# EAGLE board sw63_mk3 (EAGLE 9.6.2)
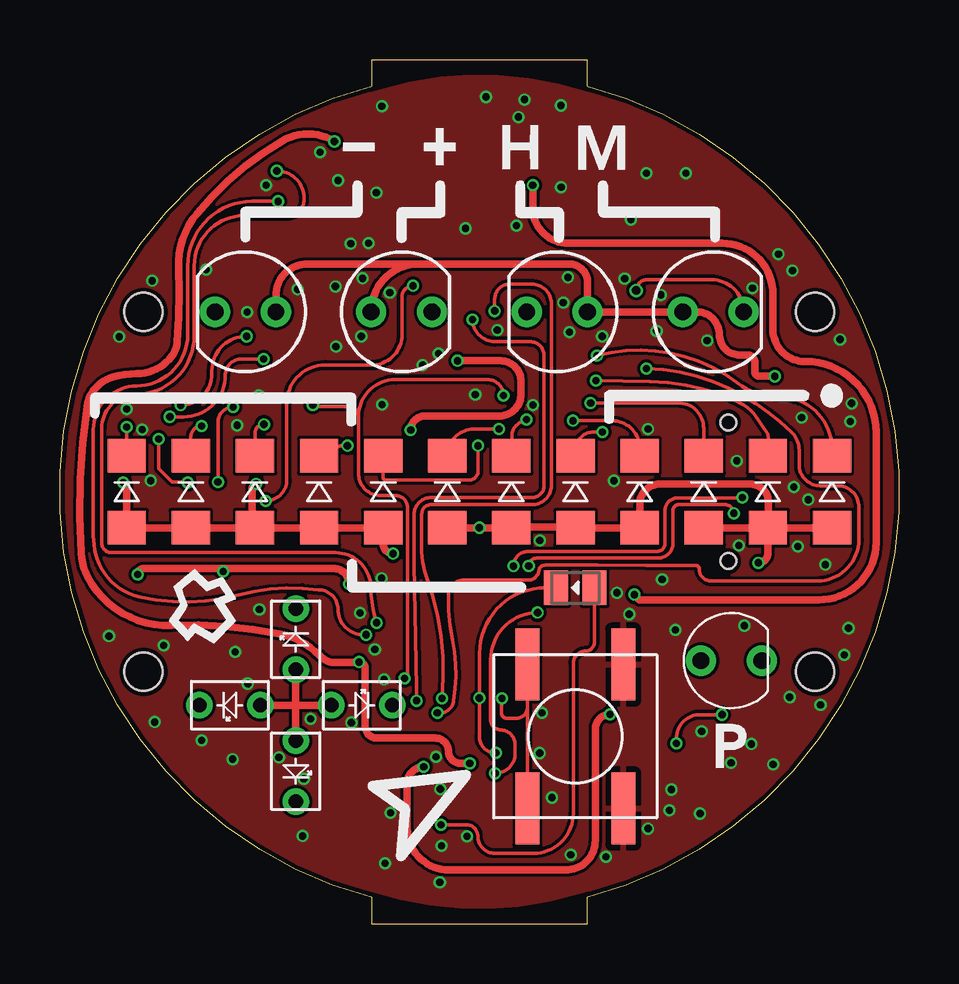
[diagram p0: board, top side]
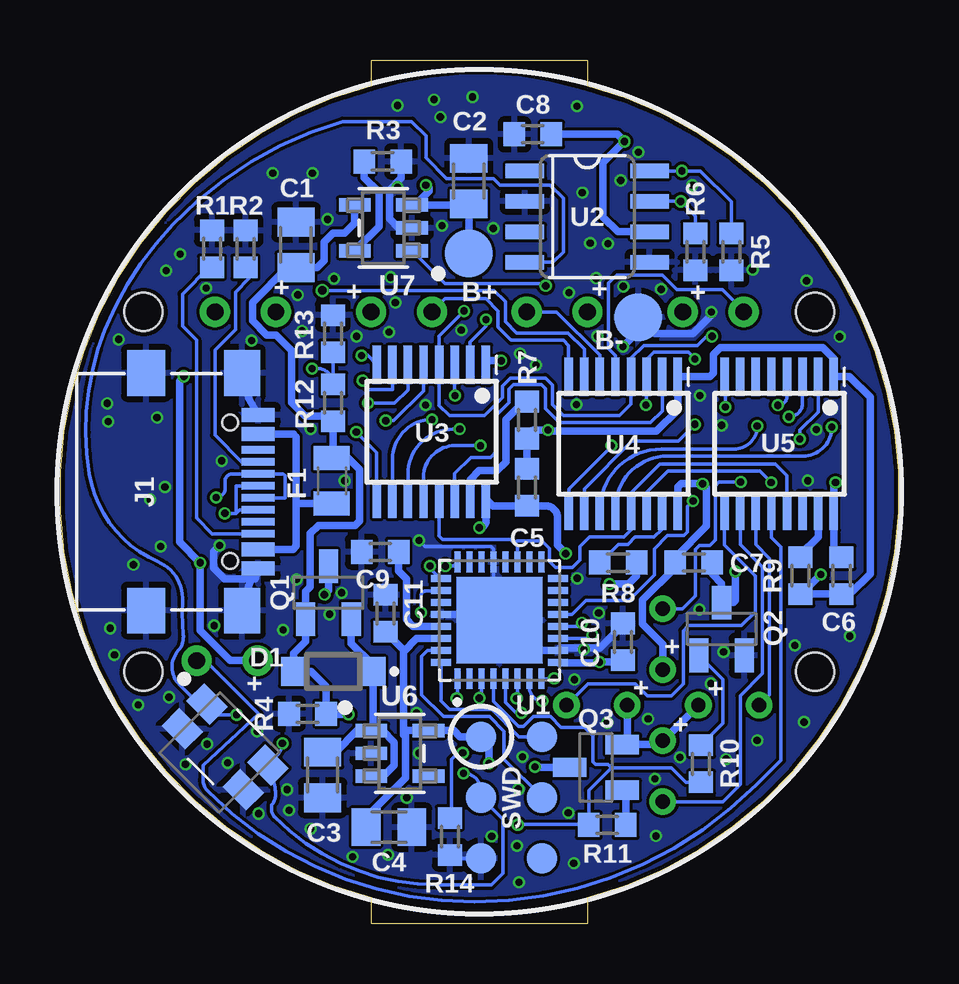
[diagram p1: board, bottom side, seen from below]

Size 34.97 x 36 mm. Coordinates in mm from the lower left corner, seen from the top.
Outline: 21.98,34.92 21.98,36 12.98,36 12.98,34.92 arc150 12.98,1.08 12.98,0 21.98,0 21.98,1.08 arc150 21.98,34.92
Copper layers (1*16): Top 0.035mm / dielectric 1.6mm / Bottom 0.035mm
Design rules "jlcpcb-2layers *": minimum track width 5mil, minimum drill 0.3mm, track to track 5mil, track to pad 5mil, pad to pad 5mil, via to via 5mil, smd to smd 5mil, copper to edge 0.2mm, drill to drill 6mil, minimum pad ring 10mil, minimum via ring 4mil, stop-mask expansion 4mil, vias tented up to drill 15mil, thermal gap 10mil
Holes 1.6 mm at 3.48,10.5 3.48,25.5 31.48,10.5 31.48,25.5
tRestrict: area 12.1,34.7 to 23.1,36.3; area 11.9,-0.3 to 22.9,1.3
bRestrict: area 12.1,34.7 to 23.1,36.3; area 11.9,-0.3 to 22.9,1.3

## Footprints (pad centres in the part's own frame; a part is rotated, then mirrored left to right if it is on the bottom)
TEST_PIN_2.0 = smd 2 x 2: P$1 0,0
CAPACITOR0805 = smd 1.2 x 1.55: 1 -0.95,0; 2 0.95,0
CAPACITOR0603 = smd 0.9 x 1: 1 -0.771,0; 2 0.771,0
SOD123 = smd 1.05 x 1.2: A 1.654,0; C -1.654,0
LED_RECT_3.2X2 = drill 0.6: A -1.27,0; K 1.27,0
PTC0805 = smd 1 x 1.5: 2 0.921,0; 3 -0.972,0
LED_5MM_BLUE = drill 0.7 pad 1.143: A -1.27,0; K 1.27,0
USB-C_FULL_SMT = smd 1.9 x 1.6: 13 -4.95,-1.089; 14 4.95,-1.089 | smd 1.9 x 1.5: 15 -4.95,2.911; 16 4.95,2.911 | smd 0.584 x 1.372: A1-B12 -3.2,3.581; A4-B9 -2.4,3.581; B1-A12 3.2,3.581; B4-A9 2.4,3.581 | smd 0.305 x 1.372: A5 -1.25,3.581; A6 -0.25,3.581; A7 0.25,3.581; A8 1.25,3.581; B5 1.75,3.581; B6 0.75,3.581; B7 -0.75,3.581; B8 -1.75,3.581 | hole 0.65: 2.896,2.413; -2.896,2.413
LED_1206 = smd 1.4 x 1.6: A -1.5,0; C 1.5,0
LED_5MM_RED = drill 0.7 pad 1.143: A -1.27,0; K 1.27,0
LED_5MM_YELLOW = drill 0.7 pad 1.143: A -1.27,0; K 1.27,0
LED_5MM_GREEN = drill 0.7 pad 1.143: A -1.27,0; K 1.27,0
LED_3MM_ALT = drill 0.7 pad 1.143: A -1.27,0; K 1.27,0
SOT23 = smd 0.8 x 1.4: 1 -0.95,-1.1; 2 0.95,-1.1; 3 0,1.1
TEMT6200FX01 = smd 1 x 1.45: C 0.8,0; E -0.8,0
RESISTOR0603 = smd 0.9 x 1: 1 -0.771,0; 2 0.771,0
KSC3XXJ = smd 3 x 1: 1 -3,2; 2 -3,-2; 3 3,2; 4 3,-2
EVQ-P7J01P = smd 1.4 x 1.05: 1_1 -1.8,0.725; 1_2 1.8,0.725; 2_1 -1.8,-0.725; 2_2 1.8,-0.725
2X3_POGO_NO_VIA = smd 1.27 x 1.27: P$1 0,0; P$2 0,2.54; P$3 2.54,0; P$4 2.54,2.54; P$5 5.08,0; P$6 5.08,2.54
QFN50P500X500X100-33N = smd 0.84 x 0.26: 1 -2.435,1.75; 2 -2.435,1.25; 3 -2.435,0.75; 4 -2.435,0.25; 5 -2.435,-0.25; 6 -2.435,-0.75; 7 -2.435,-1.25; 8 -2.435,-1.75; 17 2.435,-1.75; 18 2.435,-1.25; 19 2.435,-0.75; 20 2.435,-0.25; 21 2.435,0.25; 22 2.435,0.75; 23 2.435,1.25; 24 2.435,1.75 | smd 0.26 x 0.84: 9 -1.75,-2.435; 10 -1.25,-2.435; 11 -0.75,-2.435; 12 -0.25,-2.435; 13 0.25,-2.435; 14 0.75,-2.435; 15 1.25,-2.435; 16 1.75,-2.435; 25 1.75,2.435; 26 1.25,2.435; 27 0.75,2.435; 28 0.25,2.435; 29 -0.25,2.435; 30 -0.75,2.435; 31 -1.25,2.435; 32 -1.75,2.435 | smd 3.6 x 3.6: 33 0,0
SO8 = smd 1.6 x 0.6: 1 -2.6,1.905; 2 -2.6,0.635; 3 -2.6,-0.635; 4 -2.6,-1.905; 5 2.6,-1.905; 6 2.6,-0.635; 7 2.6,0.635; 8 2.6,1.905
TSSOP16 = smd 1.6 x 0.35: 1 -2.8,2.275; 2 -2.8,1.625; 3 -2.8,0.975; 4 -2.8,0.325; 5 -2.8,-0.325; 6 -2.8,-0.975; 7 -2.8,-1.625; 8 -2.8,-2.275; 9 2.8,-2.275; 10 2.8,-1.625; 11 2.8,-0.975; 12 2.8,-0.325; 13 2.8,0.325; 14 2.8,0.975; 15 2.8,1.625; 16 2.8,2.275
SOT23-5 = smd 1.321 x 0.559: 1 -1.194,0.95; 2 -1.194,0; 3 -1.194,-0.95; 4 1.194,-0.95; 5 1.194,0.95

## Placement (x,y rotation side)
B+  TEST_PIN_LARGE  [TEST_PIN_2.0]  17.93,27.93 0 bottom
B-  TEST_PIN_LARGE  [TEST_PIN_2.0]  10.86,25.28 0 bottom
C1  10u  [CAPACITOR0805]  25.12,28.29 90 bottom
C2  10u  [CAPACITOR0805]  17.92,30.95 90 bottom
C3  10u  [CAPACITOR0805]  24.02,6.2 270 bottom
C4  10u  [CAPACITOR0805]  21.25,4.02 0 bottom
C5  100n  [CAPACITOR0603]  15.49,18.18 270 bottom
C6  100n  [CAPACITOR0603]  2.38,14.5 90 bottom
C7  100n  [CAPACITOR0603]  8.54,15.05 180 bottom
C8  100n  [CAPACITOR0603]  15.25,32.9 180 bottom
C9  1u  [CAPACITOR0603]  21.61,15.49 0 bottom
C10  100n  [CAPACITOR0603]  11.5,11.74 270 bottom
C11  100n  [CAPACITOR0603]  21.4,12.93 270 bottom
D1  1N5819  [SOD123]  23.57,10.51 180 bottom
DOWN  LED_RECT-3.2X2  [LED_RECT_3.2X2]  9.83,6.35 270 top
F1  500mA  [PTC0805]  23.63,18.43 270 bottom
HOURS  [LED_5MM_BLUE]  20.72,25.5 180 top
J1  USB-C_2.0_SMT  [USB-C_FULL_SMT]  30.28,18 270 bottom
LD1  LED_SMT_1206  [LED_1206]  2.78,18 90 top
LD2  LED_SMT_1206  [LED_1206]  5.46,18 90 top
LD3  LED_SMT_1206  [LED_1206]  8.13,18 90 top
LD4  LED_SMT_1206  [LED_1206]  10.8,18 90 top
LD5  LED_SMT_1206  [LED_1206]  13.47,18 90 top
LD6  LED_SMT_1206  [LED_1206]  16.15,18 90 top
LD7  LED_SMT_1206  [LED_1206]  18.82,18 90 top
LD8  LED_SMT_1206  [LED_1206]  21.49,18 90 top
LD9  LED_SMT_1206  [LED_1206]  24.16,18 90 top
LD10  LED_SMT_1206  [LED_1206]  26.84,18 90 top
LD11  LED_SMT_1206  [LED_1206]  29.51,18 90 top
LD12  LED_SMT_1206  [LED_1206]  32.18,18 90 top
LEFT  LED_RECT-3.2X2  [LED_RECT_3.2X2]  7.08,9.1 180 top
MINUS  [LED_5MM_RED]  7.73,25.5 180 top
MINUTES  [LED_5MM_YELLOW]  27.23,25.5 0 top
PLUS  [LED_5MM_GREEN]  14.24,25.5 0 top
PM  [LED_3MM_ALT]  27.99,10.96 0 top
Q1  LGE2305  [SOT23]  23.77,13.79 0 bottom
Q2  BC817S  [SOT23]  7.38,12.28 0 bottom
Q3  BC817S  [SOT23]  12.62,6.51 90 bottom
Q4  TEMT6200FX01  [TEMT6200FX01]  21.48,14 0 top
R1  5k1  [RESISTOR0603]  28.63,28.13 270 bottom
R2  5k1  [RESISTOR0603]  27.23,28.12 270 bottom
R3  10k  [RESISTOR0603]  21.51,31.77 180 bottom
R4  10k  [RESISTOR0603]  24.64,8.75 0 bottom
R5  4k7  [RESISTOR0603]  6.98,28 90 bottom
R6  4k7  [RESISTOR0603]  8.48,28 90 bottom
R7  10k  [RESISTOR0603]  15.5,20.99 90 bottom
R8  10k  [RESISTOR0603]  11.7,15.04 180 bottom
R9  2k  [RESISTOR0603]  4.09,14.5 90 bottom
R10  10k  [RESISTOR0603]  8.24,6.66 270 bottom
R11  10k  [RESISTOR0603]  12.15,4.11 180 bottom
R12  5k1  [RESISTOR0603]  23.57,21.71 270 bottom
R13  10k  [RESISTOR0603]  23.58,24.59 270 bottom
R14  10k  [RESISTOR0603]  18.71,3.63 90 bottom
RIGHT  LED_RECT-3.2X2  [LED_RECT_3.2X2]  12.58,9.1 0 top
SW1  KSC321JLFS  [KSC3XXJ]  21.48,7.8 270 top
SW2  EVQ-P7J01P  [EVQ-P7J01P]  28.08,7.36 315 bottom
SWD  2X3POGONO_VIA  [2X3_POGO_NO_VIA]  17.41,7.79 270 bottom
U1  ATSAMD21E18A-MU  [QFN50P500X500X100-33N]  16.64,12.64 90 bottom
U2  DS3231MZ+  [SO8]  12.98,29.47 0 bottom
U3  TLC5916IPW  [TSSOP16]  19.48,20.5 270 bottom
U4  TLC5916IPW  [TSSOP16]  11.48,20 270 bottom
U5  TLC5916IPW  [TSSOP16]  4.98,20 270 bottom
U6  MIC5504YM5-TR  [SOT23-5]  20.8,7.09 0 bottom
U7  MCP73832T-2ACI/OT  [SOT23-5]  21.48,29 180 bottom
UP  LED_RECT-3.2X2  [LED_RECT_3.2X2]  9.83,11.85 90 top

## Library data of the parts
B+ B- = BASTL_PINHEADERS
C1-C4 = BASTL_CAPACITORS; ODOO: 0.1; SIZEX: 1.2; SIZEY: 2; SIZEZ: 1.2; TYPE: SMT
C5-C11 = BASTL_CAPACITORS; ODOO: 0.1; SIZEX: 0.85; SIZEY: 1.55; SIZEZ: 0.8; TYPE: SMT
D1 = BASTL_DIODES
DOWN HOURS LD1-LD12 LEFT MINUS MINUTES PLUS PM RIGHT UP = BASTL_LEDS
F1 = BASTL_FUSES; SIZEX: 1.2; SIZEY: 2; SIZEZ: 0.5; TYPE: SMT
J1 = BASTL_CONNECTORS
Q1 = BASTL_TRANZISTORS
Q2 Q3 = BASTL_TRANZISTORS; ASSEMBLED: yes; PRICE: 0.3; SIZEX: 2.92; SIZEY: 2.4; SIZEZ: 0.9; TYPE: SMT; VENDOR: TME
Q4 = BASTL_TRANZISTORS; AVAILABILITY: In Stock; CHECK_PRICES: https://www.snapeda.com/parts/TEMT6200FX01/Vishay+Semiconductor+Opto+Division/view-part/?ref=eda; DESCRIPTION: Phototransistors 550nm Top View 0805 (2012 Metric); MF: Vishay Semiconductor; MP: TEMT6200FX01; PACKAGE: 0805 Vishay; PRICE: None; PURCHASE-URL: https://www.snapeda.com/api/url_track_click_mouser/?unipart_id=43955&manufacturer=Vishay Semiconductor&part_name=TEMT6200FX01&search_term=temt6200fx01; SNAPEDA_LINK: https://www.snapeda.com/parts/TEMT6200FX01/Vishay+Semiconductor+Opto+Division/view-part/?ref=snap
R1-R14 = BASTL_RESISTORS; ASSEMBLED: yes; PRICE: 0.1; SIZEX: 0.85; SIZEY: 1.55; SIZEZ: 0.5; TYPE: SMT
SW1 SW2 = BASTL_SWITCHES
SWD = BASTL_CONNECTORS; TYPE: POGO
U1 = BASTL_ICS; CHECK_PRICES: https://www.snapeda.com/parts/ATSAMD21E18A-MU/Microchip/view-part/?ref=eda; DESCRIPTION: ARM® Cortex®-M0+ SAM D21E, Functional Safety (FuSa) Microcontroller IC 32-Bit Single-Core 48MHz 256KB (256K x 8) FLASH 32-VQFN (5x5); DIGIKEY_PART_NUMBER: ATSAMD21E18A-MU-ND; MF: Microchip; MP: ATSAMD21E18A-MU; PACKAGE: QFN-32 Microchip; PURCHASE-URL: https://www.snapeda.com/api/url_track_click_mouser/?unipart_id=227694&manufacturer=Microchip&part_name=ATSAMD21E18A-MU&search_term=None; SNAPEDA_LINK: https://www.snapeda.com/parts/ATSAMD21E18A-MU/Microchip/view-part/?ref=snap
U2 = BASTL_ICS; DESCRIPTION: Real Time Clock (RTC) IC Clock/Calendar I²C, 2-Wire Serial 8-SOIC (0.154, 3.90mm Width); DIGI-KEY_PART_NUMBER: DS3231MZ+-ND; MF: Maxim Integrated Products; MP: DS3231MZ+; PACKAGE: None
U3-U6 = BASTL_ICS
U7 = BASTL_ICS; MPN: MCP73831T-2ACI/OT; OC_FARNELL: 1332158; OC_NEWARK: 56K7045; PACKAGE: SOT-5; SUPPLIER: Microchip

## Nets
!CHARGING: U1.13 U7.1
!RESET: SW2.1_1 SW2.1_2 SWD.P$3 U1.26 U2.4
ACTIVE: Q4.C R10.2 R11.2 U1.4
BAT: B+.P$1 C2.1 Q1.3 U7.3
BRIGHT: U1.19 U3.13 U4.13 U5.13
BTN: SW1.2 SW1.4 U1.1
CLK: U1.8 U3.3 U4.3 U5.3
D+: J1.A6 J1.B6 U1.25
D-: J1.A7 J1.B7 U1.24
DAT: U1.7 U3.2
GND: B-.P$1 C1.2 C2.2 C3.2 C4.2 C8.2 C9.1 C10.1 C11.1 J1.13 J1.14 J1.15 J1.16 J1.A1-B12 J1.B1-A12 Q2.2 R1.1 R2.1 R3.1 R4.1 R5.1 R6.1 R13.1 R14.1 SW1.1 SW1.3 SW2.2_1 SW2.2_2 SWD.P$5 U1.10 U1.21 U1.28 U1.33 U2.2 U2.5 U6.2 U7.2
GNDLEDS: C5.1 C6.1 C7.1 Q2.3 R7.1 R8.1 R9.1 U3.1 U4.1 U5.1
LAT: U1.6 U3.4 U4.4 U5.4
LIGHT_SENS: Q4.E R14.2 U1.3
N$1: F1.2 J1.A4-B9 J1.B4-A9
N$2: J1.B5 R1.2
N$3: J1.A5 R2.2
N$4: R3.2 U7.5
N$5: LD12.C U3.8
N$7: LD11.C U3.7
N$8: R7.2 U3.15
N$9: R8.2 U4.15
N$10: R9.2 U5.15
N$11: Q2.1 R10.1
N$12: U4.14 U5.2
N$13: U3.14 U4.2
N$14: Q3.1 R11.1
N$15: PM.K U5.12
N$16: DOWN.K U5.10
N$17: LEFT.K U5.11
N$18: RIGHT.K U5.9
N$19: U5.8 UP.K
N$20: LD10.C U3.6
N$21: LD9.C U3.5
N$22: LD8.C U3.9
N$23: LD7.C U3.10
N$24: LD6.C U3.11
N$25: LD5.C U3.12
N$26: C9.2 U1.29
N$27: LD4.C U4.9
N$28: LD3.C U4.10
N$29: LD2.C U4.11
N$30: LD1.C U4.12
N$31: HOURS.K U4.8
N$32: MINUTES.K U4.7
N$33: PLUS.K U4.6
N$34: MINUS.K U4.5
SCL: R5.2 U1.12 U2.8
SDA: R6.2 U1.11 U2.7
SWCLK: SWD.P$4 U1.31
SWDIO: SWD.P$2 U1.32
VBUS_DTCT: R12.1 R13.2 U1.5
VBUS_FUSED: C1.1 D1.A F1.3 Q1.1 Q3.3 R4.2 R12.2 U7.4
VDD: C4.1 C8.1 C10.2 C11.2 SWD.P$1 U1.9 U1.30 U2.6 U6.5
VDDLEDS: C5.2 C6.2 C7.2 DOWN.A HOURS.A LD1.A LD2.A LD3.A LD4.A LD5.A LD6.A LD7.A LD8.A LD9.A LD10.A LD11.A LD12.A LEFT.A MINUS.A MINUTES.A PLUS.A PM.A Q3.2 RIGHT.A U3.16 U4.16 U5.16 UP.A
VSEL: C3.1 D1.C Q1.2 U6.1 U6.3

## Tracks (layer width: path | path; a pad name or v marks a point on that pad's centre or on a via)
!CHARGING  (via drill 0.3)
  Top 0.152: v8.57,17.62 arc90 9.46,18.5 9.46,21.68 arc-90 11.06,23.28 12.99,23.28 arc90 14.26,24.55 14.26,26.13 arc-90 v14.71,26.59
  Bottom 0.152: U1.13 13.61,12.89 13.03,13.47 11.24,13.47 10.18,14.53 10.18,15.62 9.63,16.17 8.96,16.17 8.8,16.33 8.8,17.39 v8.57,17.62 | U7.1 18.92,26.68 14.81,26.68 v14.71,26.59
!RESET  (via drill 0.3)
  Top 0.152: v27.6,8.71 26.69,8.71 arc90 25.69,7.71 v25.69,7.51 | v18.14,6.26 arc90 18.97,7.09 18.97,7.46 arc90 18.36,8.07 18.36,8.08 arc-90 17.95,8.49 17.95,11 arc-90 v19.91,12.96
  Bottom 0.152: v25.69,7.51 arc90 26.33,6.87 SW2.1_2 26.28,6.22 arc45 25.98,5.5 25.98,5.35 arc45 26.15,4.94 26.15,4.78 arc-45 26,4.42 arc-45 19.21,1.61 16.98,1.61 16.5,2.09 16.5,4.34 SWD.P$3 17.41,5.53 arc-90 v18.14,6.26 | v27.6,8.71 28.4,8.71 SW2.1_1 29.18,9.15 30.01,9.97 arc85 30.03,11.38 arc-48 29.82,12.04 arc10 29.85,13.41 arc-70 30.88,15.09 arc57 33.74,18.74 arc31 33.09,24.74 arc22 30.26,29.14 arc30 23.18,33.43 20.3,33.43 19.71,32.84 19.71,31.92 18.84,31.05 16.88,31.05 16.61,30.78 14.53,30.78 13.98,30.23 13.98,28 14.42,27.57 U2.4 | v19.91,12.96 19.91,13.67 arc90 19.72,13.86 19.11,13.86 arc-90 U1.26
ACTIVE  (via drill 0.3)
  Top 0.152: v15.88,4.12 16.93,4.12 arc-90 17.42,3.63 arc90 18.12,2.93 19.74,2.93 arc90 21.4,4.59 21.4,10.85 arc-90 21.91,11.36 arc90 22.28,11.73 Q4.C
  Bottom 0.152: R10.2 8.87,5.89 9.48,6.5 11.98,6.5 | 11.98,6.5 12.92,5.56 R11.2 12.95,4.14 15.86,4.14 v15.88,4.12 | 11.98,6.5 12.12,6.64 12.63,6.64 12.74,6.75 12.74,7.82 13.1,8.18 14.07,8.18 14.52,8.63 15.23,8.63 15.64,8.22 15.85,8.22 16.89,9.26 U1.4
BAT  (via drill 0.3)
  Top 0.305: v23.94,13.71 24.16,13.49 31.63,13.49 arc90 34.02,15.88 34.02,20.48 arc90 31.07,23.43 31.05,23.43 arc-90 29.72,24.76 29.72,26.24 arc90 27.6,28.36 21.19,28.36 arc-90 19.71,29.84 v19.71,30.78
  Bottom 0.305: Q1.3 23.77,13.88 arc-90 v23.94,13.71 | v19.71,30.78 arc-90 19.66,30.78 19.58,30.7 19.58,30.52 20.16,29.95 U7.3 17.97,29.95 C2.1 B+.P$1 arc90 B+.P$1
BRIGHT
  Bottom 0.152: U3.13 19.16,16.16 19.01,16.02 16.19,16.02 16.01,15.84 | U1.19 15.89,15.71 16.02,15.84 16.01,15.84 | 16.01,15.84 15.91,15.94 14.86,15.94 14.55,15.63 14.55,15.09 14.31,14.85 13.59,14.85 13.28,15.16 13.28,15.72 12.89,16.11 11.45,16.11 11.16,16.41 U4.13 11.16,17.95 9.95,19.16 5.14,19.16 4.66,18.68 U5.13
BTN  (via drill 0.3)
  Top 0.152: SW1.4 19.48,9 | 19.48,9 SW1.2 | 19.48,9 arc-90 19.04,8.56 18.61,8.56 arc-90 18.41,8.76 v18.41,9.38 v18.42,9.39
  Bottom 0.152: U1.1 18.39,9.42 v18.42,9.39
CLK  (via drill 0.3)
  Top 0.152: v10.54,21.61 arc90 10.6,21.55 12.03,21.55 arc-90 12.44,21.14 | v14.36,10.22 14.48,10.34 14.48,17.36 arc90 14,17.84 13.37,17.84 arc-90 12.44,18.77 12.44,21.14 | v4.58,21.12 5.16,21.12 arc90 6.89,22.85 arc-90 7.58,23.54 v8.49,23.54 | v18.49,22.01 arc90 17.83,22.67 13.98,22.67 arc90 12.44,21.14
  Bottom 0.152: U3.3 18.51,22.02 v18.49,22.01 | v10.54,21.61 arc-90 10.51,21.64 U4.3 10.51,23.52 10.21,23.82 8.77,23.82 v8.49,23.54 | U1.8 14.38,10.21 v14.36,10.22 | U5.3 4.01,21.7 arc90 v4.58,21.12
D+  (via drill 0.3)
  Top 0.152: v28.09,17.1 arc90 27.73,17.46 25.79,17.46 arc90 25.55,17.22 25.55,15.85 arc-90 24.93,15.23 19.86,15.23 arc90 v19.54,14.91
  Bottom 0.152: J1.B6 27.48,17.25 27.63,17.1 | 27.63,17.1 27.63,18.23 26.42,18.23 J1.A6 | 27.63,17.1 v28.09,17.1 | v19.54,14.91 19.54,14.81 19.12,14.39 U1.25
D-  (via drill 0.3)
  Top 0.152: v28.45,17.76 arc-90 28.43,17.74 25.73,17.74 arc90 25.22,17.23 25.22,15.86 arc-90 24.87,15.51 19.51,15.51 arc90 v18.9,14.9
  Bottom 0.152: J1.A7 25.58,17.75 25.58,18.67 25.66,18.75 J1.B7 27.77,18.75 arc-90 28.08,18.44 28.08,18.13 arc90 v28.45,17.76 | U1.24 18.57,14.9 v18.9,14.9
DAT  (via drill 0.3)
  Top 0.152: v17.2,25.18 arc90 18.12,24.26 19.59,24.26 arc-90 20.18,23.67 20.18,18.26 arc-90 19.68,17.76 15.48,17.76 arc90 14.76,17.04 14.76,15 14.87,9.83 arc5 v14.86,9.29
  Bottom 0.152: v14.86,9.29 arc90 15.39,9.82 U1.7 | v17.2,25.18 arc-90 17.2,24.91 17.88,24.23 17.88,23.32 U3.2
GND  (via drill 0.3)
  Bottom 0.152: SWD.P$5 18.56,2.71 R14.1 | 16.89,12.89 U1.21 16.89,15.61 17,15.72 19.75,15.72 v20,15.97
  Bottom 0.305: U1.28 16.89,12.89 U1.33 15.39,11.39 U1.10 14.12,11.48 12.46,11.48 11.5,12.45 C10.1 | v7.81,25.49 7.81,25.36 8.58,24.59 10.17,24.59 B-.P$1 10.86,24.7 v11.5,24.05 | J1.A1-B12 27.07,21.87 J1.15 | J1.16 27.07,14.13 J1.B1-A12 26.83,14.37 28.1,14.37 28.56,14.82 28.56,15.51 v28.3,15.77 | U7.2 20.85,29 21.23,29.38 21.23,30.58 20.74,31.07 R3.1
  other vias: 8.29,22.01 7.38,20.77 3.78,18.46 2.78,21.45 2.46,24.46 15.78,23.77 15.12,23.28 21.24,24.66 25.05,26.2 24.87,24.71 33,21.68 32.95,20.92 30.92,21.1 32.52,24.35 30.54,27.22 24.44,31.28 26.09,31.28 20.89,34.1 17.76,34.46 13.42,34.08 13.19,30.47 12.86,28.36 13.75,26.31 11.59,30.98 10.85,32.16 8.59,30.78 3.84,26.79 6.09,27.26 13.4,14.39 12.51,12.95 20.1,8.78 20,7.1 20.51,5.25 15.86,5.61 15.68,6.95 13.78,4.61 10.17,6.04 7.2,6.85 7.3,11.32 3.95,8.4 5.9,7.64 4.33,11.6 2.04,11.98 8.31,13.1 23.73,12.9 23.22,13.79 28.53,12.42 25.66,12.23 32.88,12.31 32.7,11.19 31.71,9.11 29.73,6.64 28.83,7.48 30.42,9.44 27.98,6.69 26.75,8.01 26.68,4.58 25.49,5.58 25.41,4.72 24.52,3.95 21.29,2.86 22.77,2.79 15.91,3.24 16.97,3.64 13.55,2.51 15.83,1.72 10.12,3.65 12.15,8.37 7.83,10 13.12,11.42 31.2,17.67 30.76,15.72 31.9,14.96 28.22,19.29 28.87,26.49 26.98,24.31 20.89,30.7 19.37,34.35 19.03,29.09 16.9,28.98 9.9,26.44 11.48,26.56 12.12,28.34 12.61,26.9 12.56,24.48 18.23,24.74 17.31,22.05 3.43,20.59 13.51,10.17 13.43,21.63 19.72,21.61 23.1,18.46 9.13,6.93 10.45,8.53 25.1,14.34 24.52,20.62 20.98,25.89 22.6,24.48 23.54,26.88 21.18,26.94 19.11,33.62 23.81,29.35 29.95,27.91 30.59,18.2
  pour Bottom: -0.02,0.5 -0.02,35.5 34.98,35.5 34.98,0.5
  pour Top: -0.02,0.5 -0.02,35.5 34.98,35.5 34.98,0.5
GNDLEDS  (via drill 0.3)
  Top 0.305: v16.57,23.46 18.36,23.46 arc-90 19.22,22.6 19.22,22.07 arc-90 18.31,21.16 15.21,21.16 arc90 v14.62,20.57 | v12.05,14.15 arc90 11.4,14.8 6.93,14.8 | v6.81,14.68 6.93,14.8 | 6.93,14.8 3.49,14.8 arc90 v3.24,14.55
  Bottom 0.305: R8.1 10.93,14.5 11.28,14.15 v12.05,14.15 | v3.24,14.55 4.06,13.73 R9.1 C6.1 2.04,13.73 1.19,14.58 1.19,21.94 2.05,22.8 U5.1 2.71,23.56 3.15,24.01 7.44,24.01 7.73,23.72 7.73,22.94 7.87,22.8 U4.1 9.21,21.41 10.09,20.53 14.58,20.53 v14.62,20.57 15.15,20.57 | R7.1 15.15,20.57 | R7.1 15.49,20.21 C5.1 | R7.1 arc90 15.15,20.57 | U3.1 arc90 17.05,23.46 v16.57,23.46 | C7.1 7.77,14.57 7.38,14.18 Q2.3 6.89,13.38 6.81,13.46 v6.81,14.68
LAT  (via drill 0.3)
  Top 0.152: v18.12,25.54 18.12,26.03 arc-90 18.74,26.65 19.68,26.65 arc-90 20.48,25.85 20.48,18.26 arc-90 19.68,17.46 15.46,17.46 arc90 15.08,17.08 15.08,15.5 arc21 15.26,14.51 arc-26 v15.92,9.39 | v5.04,21.61 arc90 6.33,22.9 6.33,23.05 arc-90 7.75,24.48 v7.78,24.48
  Bottom 0.152: U1.6 15.89,9.42 v15.92,9.39 | v18.12,25.54 v18.12,25.53 19.16,24.5 U3.4 19.16,21.59 18.73,21.17 17.27,21.17 16.52,21.92 16.52,22.41 16.19,22.74 14.73,22.74 14.44,22.45 14.44,21.63 13.98,21.17 11.65,21.17 11.16,21.66 U4.4 11.16,23.56 10.63,24.1 8.39,24.1 8.01,24.48 v7.78,24.48 | U5.4 4.66,21.99 arc90 v5.04,21.61
LIGHT_SENS  (via drill 0.3)
  Top 0.152: Q4.E 20.23,14 arc90 17.49,11.26 v17.49,9.41 v17.48,9.4 17.48,7.8 arc90 v18.17,7.11
  Bottom 0.152: U1.3 17.39,9.65 17.48,9.56 v17.48,9.4 | R14.2 18.65,4.46 18.65,6.84 18.38,7.11 v18.17,7.11
N$1
  Bottom 0.305: J1.B4-A9 25.24,15.6 25.11,15.73 25.11,17.45 | J1.A4-B9 25.22,20.4 25.11,20.29 25.11,17.45 | F1.2 25.05,17.51 25.11,17.45
N$2
  Bottom 0.152: R1.2 28.74,27.36 29.85,26.25 29.85,24.91 29.27,24.33 29.27,16.9 28.62,16.25 J1.B5
N$3
  Bottom 0.152: R2.2 27.07,27.19 27.07,26.9 27.64,26.33 27.64,24.77 28.5,23.91 28.5,20.36 27.39,19.25 J1.A5
N$4
  Bottom 0.305: U7.5 21.67,29.05 21.67,30.48 22.28,31.09 R3.2
N$5  (via drill 0.3)
  Top 0.152: LD12.C 32.18,19.8 arc90 30.04,21.95 arc-37 28.22,22.55 arc52 v22.39,23.68
  Bottom 0.152: U3.8 22.15,23.69 v22.38,23.69 v22.39,23.68
N$7  (via drill 0.3)
  Top 0.152: v22.34,22.63 24.6,22.59 arc-24 28.19,21.78 arc-21 28.93,21.27 29.51,20.4 arc-21 LD11.C
  Bottom 0.152: U3.7 21.11,22.27 22.07,22.27 22.39,22.59 v22.34,22.63
N$8
  Bottom 0.305: U3.15 17.86,18.52 17.49,18.88 16.74,18.88 16.37,19.25 16.37,21.01 15.62,21.76 R7.2
N$9
  Bottom 0.152: R8.2 12.44,15.04 11.68,15.8 11.3,15.8 10.99,16.11 10.2,16.11 9.88,16.44 9.88,17.18 U4.15
N$10
  Bottom 0.305: R9.2 4.09,15.39 3.36,16.12 U5.15
N$11
  Bottom 0.152: R10.1 7.33,8.34 7.33,10.18 Q2.1
N$12  (via drill 0.3)
  Top 0.152: v4.12,20.2 4.12,18.98 4.68,18.41 5.29,18.41 v5.32,18.38
  Bottom 0.152: U4.14 10.51,17.98 9.62,18.86 5.8,18.86 v5.32,18.38 | U5.2 3.36,21.33 4.12,20.57 v4.12,20.2
N$13
  Bottom 0.152: U3.14 18.51,18.75 17.83,19.43 17.02,19.43 16.74,19.71 16.74,21.22 16.24,21.73 16.24,22.29 16.06,22.46 14.88,22.46 14.73,22.31 14.73,21.47 14.15,20.89 10.34,20.89 9.86,21.38 U4.2
N$14
  Bottom 0.305: R11.1 11.38,5.42 Q3.1
N$15
  Bottom 0.152: PM.K 28.91,10.96 26.68,8.74 29,6.6 29,6 arc-45 28.8,5.5 arc-45 17.69,0.91 arc-45 5.94,5.77 4.91,6.8 4.91,15.7 5.31,16.1 U5.12
N$16
  Bottom 0.152: U5.10 6.61,15.8 5.68,14.88 5.68,10.43 6.61,9.5 6.61,5.8 7.33,5.08 DOWN.K
N$17
  Bottom 0.152: U5.11 5.96,15.8 5.38,15.22 5.38,9.53 LEFT.K
N$18
  Bottom 0.152: RIGHT.K 12.95,10 10.98,10 10.48,9.5 9.48,9.5 8.98,10 8.98,12.2 8.76,12.43 6.56,12.43 5.98,13 5.98,14.5 7.26,15.78 U5.9
N$19  (via drill 0.3)
  Top 0.152: v6.59,18.4 6.59,20.9 arc-90 v7.22,21.53
  Bottom 0.152: UP.K 9.03,13.12 8.48,13.66 8.48,15.59 8.31,15.76 7.87,15.76 7.65,15.99 7.65,18.24 7.49,18.4 v6.59,18.4 | v7.22,21.53 7.22,22.76 arc-90 U5.8
N$20  (via drill 0.3)
  Top 0.152: LD10.C 26.84,20.64 arc90 25.78,21.7 v22.12,21.7
  Bottom 0.152: v22.12,21.7 v22.11,21.69 21.02,21.69 20.46,22.25 U3.6
N$21  (via drill 0.3)
  Top 0.152: LD9.C 24.16,19.82 arc90 23.02,20.96 v21.38,20.96
  Bottom 0.152: v21.38,20.96 21.05,20.96 19.81,22.2 U3.5
N$22  (via drill 0.3)
  Top 0.152: LD8.C 21.49,19.73 arc-90 22.25,20.49 v22.61,20.49
  Bottom 0.152: v22.61,20.49 21.76,19.64 U3.9
N$23  (via drill 0.3)
  Top 0.152: v19.45,21.01 19.45,20.95 arc90 18.84,20.34 18.84,19.52 arc-90 LD7.C
  Bottom 0.152: U3.10 21.11,19.36 arc90 v19.45,21.01
N$24  (via drill 0.3)
  Top 0.152: v18.3,20.61 17.26,20.61 arc90 LD6.C
  Bottom 0.152: U3.11 20.46,18.73 arc90 18.58,20.61 v18.3,20.61
N$25  (via drill 0.3)
  Top 0.152: LD5.C arc-90 13.5,19.47 arc90 13.47,19.44 13.47,18.59 arc90 13.58,18.48 17.04,18.48 arc90 17.43,18.87 v17.43,19.92
  Bottom 0.152: U3.12 19.81,18.61 arc90 18.5,19.93 v17.44,19.93 v17.43,19.92
N$26
  Bottom 0.305: C9.2 20.84,14.7 20.52,14.37 20.52,12.67 20.24,12.39 U1.29
N$27  (via drill 0.3)
  Top 0.152: v11.98,19.92 11.77,19.92 arc90 11.35,19.5 LD4.C
  Bottom 0.152: v11.98,19.92 11.98,19.89 13.75,18.12 13.75,17.21 U4.9
N$28  (via drill 0.3)
  Top 0.152: LD3.C 8.13,20.43 arc-90 v8.5,20.81
  Bottom 0.152: v8.5,20.81 9.19,20.12 11.11,20.12 13.11,18.12 U4.10
N$29  (via drill 0.3)
  Top 0.152: v5.9,20.73 arc90 5.46,20.29 LD2.C
  Bottom 0.152: U4.11 12.46,17.21 arc90 9.89,19.78 6.85,19.78 arc-90 v5.9,20.73
N$30  (via drill 0.3)
  Top 0.152: v2.78,20.7 LD1.C
  Bottom 0.152: U4.12 11.81,17.32 arc90 9.63,19.49 3.99,19.49 arc-90 v2.78,20.7
N$31
  Bottom 0.152: U4.8 13.76,24.09 13.98,24.32 16.16,24.32 16.7,24.86 16.7,25.54 17.21,26.05 18.9,26.05 HOURS.K
N$32  (via drill 0.35)
  Top 0.152: MINUTES.K arc90 27.16,26.84 24.47,26.84 arc90 v24.02,26.39
  Bottom 0.152: U4.7 13.11,23.95 13.78,24.62 15.93,24.62 16.4,25.09 16.4,25.93 16.86,26.39 v24.02,26.39
N$33
  Bottom 0.152: U4.6 12.46,23.7 14.26,25.5 PLUS.K
N$34
  Bottom 0.152: U4.5 11.81,23.68 12.09,23.96 12.09,26.69 11.75,27.03 9.85,27.03 9.34,26.52 9.25,26.43 7.35,26.43 6.46,25.55 MINUS.K
SCL  (via drill 0.3)
  Top 0.152: v9.04,31.38 arc-90 10.17,30.25 10.17,30.18 arc-90 9.5,29.51 7.68,29.51 arc90 5.6,27.43 5.6,24.52 arc-90 3.14,22.05 arc90 1.74,20.66 1.74,15.87 arc90 2.15,15.46 11.49,15.46 arc-90 12.96,13.99 arc19 v13.2,12.54
  Bottom 0.152: R5.2 6.98,30.1 8.26,31.38 v9.04,31.38 U2.8 | U1.12 13.35,12.39 arc-90 v13.2,12.54
SDA  (via drill 0.3)
  Top 0.152: v9.09,30.11 8.01,30.11 arc90 5.32,27.42 5.32,24.55 arc-90 3.19,22.41 3.2,22.41 arc90 1.39,20.6 1.39,16.16 arc19 1.55,15.2 arc58 3.31,13.62 arc28 7.45,13.7 arc-23 10.78,13.91 arc-90 11.59,13.1 arc90 12.65,12.04 v12.76,12.04
  Bottom 0.152: R6.2 8.48,29.5 v9.09,30.11 U2.7 | U1.11 12.91,11.89 v12.76,12.04
SWCLK
  Bottom 0.152: U1.31 19.63,11.39 19.89,11.13 19.89,9.54 18.98,8.63 17.06,8.63 16.45,8.02 16.45,6.85 14.87,5.28 SWD.P$4
SWDIO
  Bottom 0.152: U1.32 19.08,9.28 18.72,8.92 16.95,8.92 15.82,7.79 SWD.P$2
VBUS_DTCT  (via drill 0.3)
  Top 0.152: v24.45,23.14 arc-29 28.48,22 arc-13 30.48,20.5 arc-46 30.81,19.73 30.81,19.13 arc90 31.69,18.25 32.42,18.25 arc-90 33.3,17.37 33.3,16.01 arc-90 31.57,14.28 27.14,14.28 arc-90 26.65,14.77 arc90 26.49,14.93 arc0 20.36,14.95 arc9 20.17,14.94 arc29 20.06,14.89 arc2 20.01,14.85 arc48 19.98,14.79 arc-68 19.63,14.32 16.85,14.32 arc90 16.19,13.66 arc11 16.37,11.83 arc-20 16.42,9.29 arc-89 v15.73,8.78
  Bottom 0.152: R13.2 23.58,22.99 23.57,22.98 R12.1 arc-90 24.23,23.14 v24.45,23.14 | U1.5 16.39,9.21 15.96,8.78 v15.73,8.78
VBUS_FUSED  (via drill 0.3)
  Top 0.305: v22.93,8.72 arc90 22.31,8.1 22.31,3.46 arc-90 21.08,2.23 16.22,2.23 arc-90 14.47,3.98 14.47,5.84 arc-90 v15.16,6.53
  Bottom 0.305: U7.4 22.68,29.2 23.09,28.78 23.58,28.78 23.95,28.41 23.95,27.63 24.24,27.34 C1.1 25.49,27.34 26.94,25.89 26.94,25.13 26.34,24.53 25.95,24.53 25.31,23.88 25.31,21.71 24.75,21.16 23.79,21.16 R12.2 23.57,19.46 F1.3 22.95,19.4 22.48,18.93 22.48,16.79 22.67,16.6 24.19,16.6 24.53,16.26 24.53,14.04 24.72,13.85 Q1.1 24.72,11.76 25.23,11.26 D1.A 24.49,10.51 23.87,9.89 R4.2 arc-90 23.85,8.72 v22.93,8.72 | Q3.3 15.14,6.51 arc90 v15.16,6.53
VDD  (via drill 0.3)
  Top 0.305: v17.08,6.68 16.7,6.68 arc-90 16.19,7.19 arc90 15.65,7.73 13.22,7.73 arc-90 12.72,8.23 12.72,10.65 arc90 v12.47,10.9 v12.46,10.89 11.48,10.88 arc-47 10.84,11.15 arc35 9.15,12.08 arc14 4.64,12.43 arc-65 1.16,14.45 arc-24 0.88,15.44 arc-12 1.13,21.55 arc-66 2.21,22.78 arc-16 3.2,22.92 arc53 4.66,23.65 arc33 4.89,24.26 arc6 4.94,27.31 arc-42 5.72,29.6 arc-20 9.26,32.62 arc-62 v11.44,32.61
  Bottom 0.305: C8.1 11.73,32.9 v11.44,32.61 12.33,31.72 12.33,29.46 11.71,28.84 U2.6 | U1.9 14.19,10.87 12.5,10.87 v12.47,10.9 11.57,10.9 C10.2 | C4.1 22.2,4.43 20.55,6.08 20.55,7.96 | 20.55,7.96 20.65,7.86 20.65,11.33 | 20.55,7.96 20.47,8.04 U6.5 18.54,8.04 18.29,7.79 SWD.P$1 arc90 17.08,7.46 v17.08,6.68 | U1.30 20.09,11.89 20.65,11.33 | 20.65,11.33 20.65,11.42 C11.2
VDDLEDS  (via drill 0.3)
  Top 0.305: PLUS.A arc-90 14.97,27.5 | 14.97,27.5 10.32,27.5 arc90 9,26.18 MINUS.A | UP.A DOWN.A | LEFT.A RIGHT.A | LD3.A LD2.A LD1.A 2.78,18.23 v2.63,18.38 | LD3.A LD4.A LD5.A 13.47,15.83 arc90 v13.88,15.42 | LD10.A LD11.A | LD12.A LD11.A | LD11.A 29.51,15.43 arc-90 v29.12,15.04 | LD11.A arc90 29.53,16.52 29.53,17.56 arc90 28.77,18.32 25,18.32 arc90 24.17,17.49 LD9.A arc-90 LD9.A LD8.A 21.45,16.54 18.86,16.54 LD7.A v17.48,16.5 LD6.A | LD3.A 8.01,16.61 8.01,18.17 v8.17,18.33 | 14.97,27.5 21.21,27.5 arc-90 21.99,26.72 HOURS.A MINUTES.A 26.54,25.5 arc-90 27.49,24.55 arc90 28.34,23.7 28.65,23.7 arc-90 28.96,23.39 28.96,23.03 arc90 29.18,22.81 v29.8,22.81
  Bottom 0.305: PM.A 27.87,10.96 29.12,12.21 v29.12,15.04 29.98,15.9 29.98,22.61 29.8,22.79 v29.8,22.81 | RIGHT.A 11.31,7.67 Q3.2 9.99,7.46 DOWN.A LEFT.A | v17.48,16.5 arc-90 17.21,16.77 U3.16 16.92,17.41 C5.2 14.72,17.41 arc90 14.22,16.91 14.22,15.78 13.88,15.44 arc-90 v13.88,15.42 | UP.A 9.83,11.64 10.68,12.49 10.68,13.48 9.31,14.84 C7.2 9.31,15.27 8.01,16.57 8.01,18.17 v8.17,18.33 8.19,18.35 9.05,18.35 9.21,18.2 U4.16 | C6.2 2.71,15.6 U5.16 2.71,18.3 v2.63,18.38
VSEL
  Bottom 0.305: C3.1 23.48,7.15 22.58,8.04 U6.1 | U6.3 21.49,6.14 21.03,6.6 21.03,7.55 21.52,8.04 U6.1 | U6.1 21.92,8.11 D1.C 21.92,10.78 22.82,11.68 Q1.2

## Text on the board
bPlace: + | + | + | + | + | + | + | + | +